# EAGLE board singleNode (EAGLE 9.0.1)
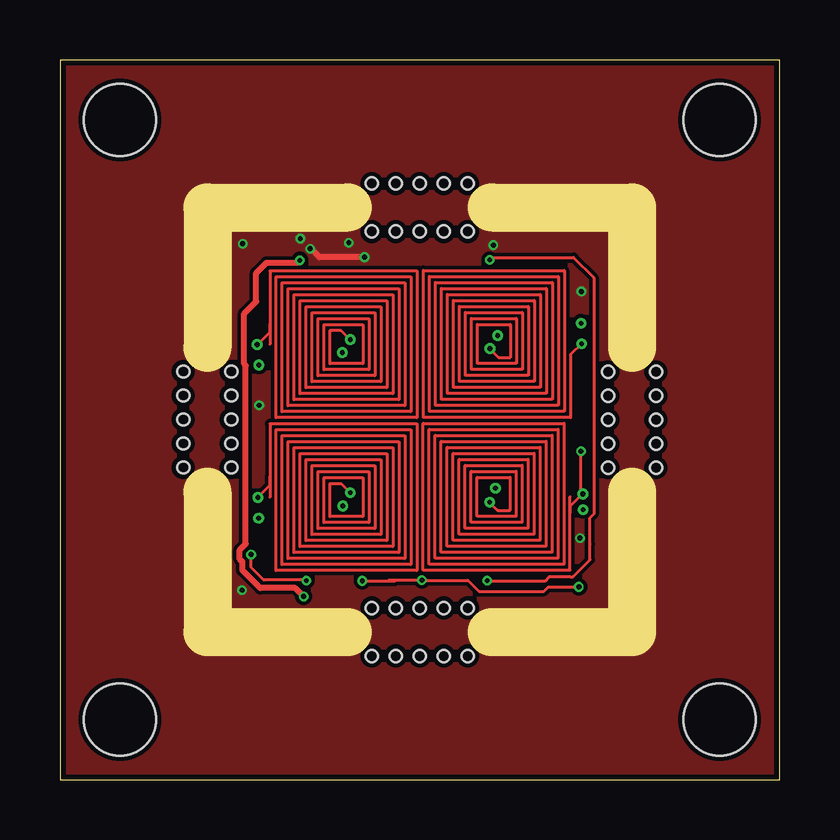
[diagram p0: board, top side]
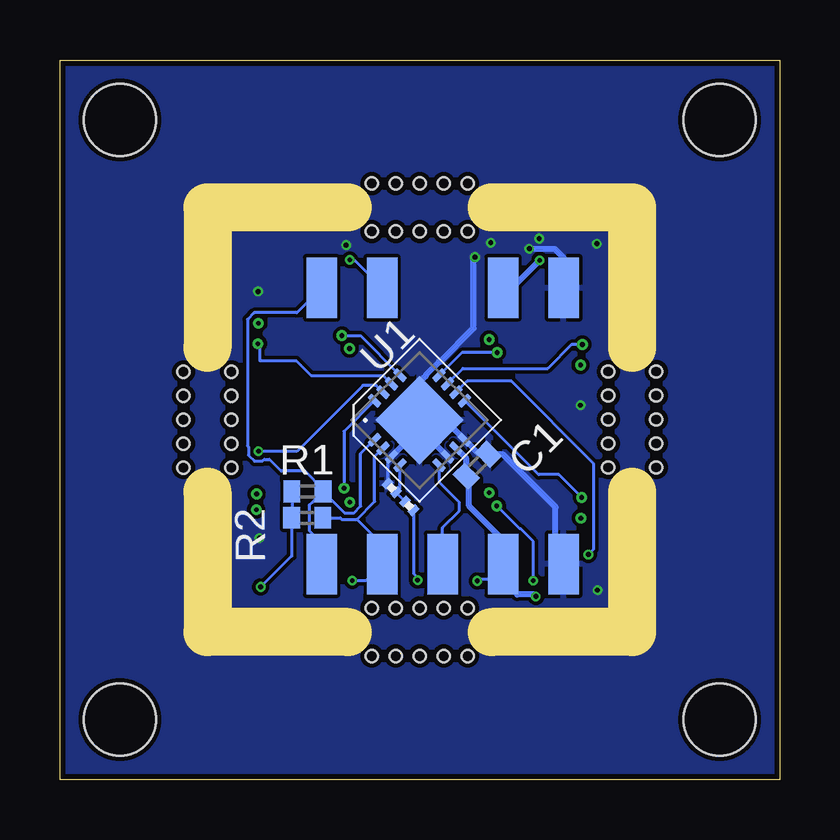
[diagram p1: board, bottom side, seen from below]

Size 30 x 30 mm. Coordinates in mm from the lower left corner, seen from the top.
Outline: 0,0 30,0 30,30 0,30 0,0
Copper layers (1+2*15+16): Top 0.035mm / dielectric 0.22mm / Route2 0.035mm / dielectric 0.99mm / Route15 0.035mm / dielectric 0.22mm / Bottom 0.035mm
Design rules "pcbtrain4l_narrowannulus": minimum track width 0.15mm, minimum drill 0.2mm, track to track 0.15mm, track to pad 0.15mm, pad to pad 0.15mm, via to via 0.15mm, smd to smd 0mil, copper to edge 9mil, drill to drill 0.2mm, minimum pad ring 0.125mm, minimum via ring 0.1mm, stop-mask expansion 0.125mm, vias tented up to drill 0.6mm, thermal gap 6mil
Holes 3 mm at 2.5,2.5 27.5,2.5 2.5,27.5 27.5,27.5
Holes 0.5 mm at 13,22.85 14,22.85 15,22.85 16,22.85 17,22.85 13,24.85 14,24.85 15,24.85 16,24.85 17,24.85 7.14,13.01 7.14,14.01 7.14,15.01 7.14,16.01 7.14,17.01 5.14,13.01 5.14,14.01 5.14,15.01 5.14,16.01 5.14,17.01 24.85,13 24.85,14 24.85,15 24.85,16 24.85,17 22.85,13 22.85,14 22.85,15 22.85,16 22.85,17 13,5.15 14,5.15 15,5.15 16,5.15 17,5.15 13,7.15 14,7.15 15,7.15 16,7.15 17,7.15
Milling: 8 lines

## Footprints (pad centres in the part's own frame; a part is rotated, then mirrored left to right if it is on the bottom)
C0402 = smd 0.7 x 0.9: 1 -0.65,0; 2 0.65,0
SMD1,27-2,54 = smd 1.27 x 2.54: 1 0,0
R0402 = smd 0.7 x 0.9: 1 -0.65,0; 2 0.65,0
R0201 = smd 0.28 x 0.43: 1 -0.255,0; 2 0.255,0
WQFN-16 = smd 0.6 x 0.25: ADDR -1.9,-0.75; CLIKIN -1.9,-0.25; IN0A 1.9,-0.75; IN0B 1.9,-0.25; IN1A 1.9,0.25; IN1B 1.9,0.75; SCL -1.9,0.75; SDA -1.9,0.25 | smd 2.6 x 2.6: DAP 0,0 | smd 0.25 x 0.6: GND 0.75,-1.9; IN2A 0.75,1.9; IN2B 0.25,1.9; IN3A -0.25,1.9; IN3B -0.75,1.9; INTB -0.75,-1.9; SD -0.25,-1.9; VDD 0.25,-1.9
FAT_SQUARE = drill 0.2 pad 0.3: EXITCOIL0 -3.239,2.822; EXITCOIL1 -3.219,-3.568; EXITCOIL2 3.239,3.528; EXITCOIL3 3.149,-2.832; INCOIL0 -6.79,3.15; INCOIL1 -6.76,-3.22; INCOIL2 6.74,3.19; INCOIL3 6.79,-3.07; INT1_INT2_COIL0 -6.716,2.299; INT1_INT2_COIL1 -6.726,-4.081; INT1_INT2_COIL2 6.716,4.041; INT1_INT2_COIL3 6.806,-3.729; TOP_INT1_COIL0 -2.905,3.36; TOP_INT1_COIL1 -2.905,-3.02; TOP_INT1_COIL2 2.915,2.99; TOP_INT1_COIL3 2.905,-3.42

## Placement (x,y rotation side)
C1  10uF  [C0402]  12.6,13.1 45 bottom
PAD1  WIREPADSMD1,27-254  [SMD1,27-2,54]  11.53,20.5 0 bottom
PAD2  WIREPADSMD1,27-254  [SMD1,27-2,54]  11.53,8.98 180 bottom
PAD3  WIREPADSMD1,27-254  [SMD1,27-2,54]  9.01,8.98 180 bottom
PAD4  WIREPADSMD1,27-254  [SMD1,27-2,54]  9.01,20.5 0 bottom
PAD5  WIREPADSMD1,27-254  [SMD1,27-2,54]  14.05,8.98 0 bottom
PAD6  WIREPADSMD1,27-254  [SMD1,27-2,54]  16.57,8.98 0 bottom
PAD7  WIREPADSMD1,27-254  [SMD1,27-2,54]  19.09,8.98 0 bottom
PAD9  WIREPADSMD1,27-254  [SMD1,27-2,54]  16.57,20.5 0 bottom
PAD10  WIREPADSMD1,27-254  [SMD1,27-2,54]  19.09,20.5 0 bottom
R1  10k  [R0402]  19.68,12.01 180 bottom
R2  10k  [R0402]  19.69,10.91 180 bottom
R3  NOFIT  [R0201]  15.44,11.41 315 bottom
R4  NOFIT  [R0201]  16.17,12.16 315 bottom
U1  LDC1614  [WQFN-16]  15.01,14.98 45 bottom
U$2  FATSQUARE_GROUP  [FAT_SQUARE]  15.01,14.98 0 top

## Library data of the parts
C1 R1-R4 = resistor
PAD1-PAD7 PAD9 PAD10 = wirepad
U1 = LDC1614
U$2 = coils

## Nets
ADDR: R3.1 R4.2 U1.ADDR
GND: C1.2 PAD3.1 PAD4.1 R4.1 U1.CLIKIN U1.DAP U1.GND U1.SD
INTRPT: PAD5.1 U1.INTB
N$6: U1.IN1A U$2.INCOIL0
N$7: U1.IN1B U$2.EXITCOIL0
N$8: U1.IN0A U$2.INCOIL1
N$9: U1.IN0B U$2.EXITCOIL1
N$10: U1.IN2A U$2.EXITCOIL2
N$11: U1.IN2B U$2.INCOIL2
N$12: U1.IN3A U$2.INCOIL3
N$13: U1.IN3B U$2.EXITCOIL3
SCL: PAD7.1 PAD10.1 R1.1 U1.SCL
SDA: PAD6.1 PAD9.1 R2.1 U1.SDA
VDD: C1.1 PAD1.1 PAD2.1 R1.2 R2.2 R3.2 U1.VDD

## Tracks (layer width: path | path; a pad name or v marks a point on that pad's centre or on a via)
ADDR
  Bottom 0.125: R3.1 15.99,11.96 | 15.99,11.96 R4.2 | U1.ADDR 15.82,12.13 15.99,11.96
GND  (via drill 0.2, 0.2 pad 0.1)
  Top 0.25: v10.43,22.13 10.47,22.13 10.82,21.78 v12.7,21.78
  Bottom 0.125: PAD3.1 9.01,8.59 | U1.CLIKIN 16.35,13.29 R4.1 | U1.CLIKIN
  Bottom 0.25: 15.01,14.63 U1.DAP | 15.01,13.39 15.01,14.32 | 15.01,14.32 U1.DAP | U1.DAP 13.95,14.98 U1.GND | U1.CLIKIN 15.01,14.63 | 15.01,14.63 U1.DAP | PAD3.1 9.01,9.74 | 12.76,18.82 12.78,18.84 | PAD3.1 | 12.53,13.56 11.54,13.56 9.34,11.36 9.34,9.31 PAD3.1 | U1.SD 14.7,14.32 15.01,14.32 | C1.2 12.53,13.56 | 12.53,13.56 U1.GND | U1.GND | v10.42,22.12 v10.43,22.13 9.38,22.13 9.01,21.76 PAD4.1 | 12.76,18.82 12.76,21.72 v12.7,21.78 | U1.DAP 15.01,16.57 14.76,16.82 14.76,16.86 14.2,17.42 14.16,17.42 12.76,18.82
  other vias: 10.02,22.55 7.62,22.34 7.59,7.9 12.04,22.38 18.07,22.28 21.74,20.35 21.68,10.07 8.3,15.6
  pour Bottom: -0.17,30.41 30.58,30.09 30.3,-0.34 -0.51,-0.28
  pour Top: -0.42,-0.28 -0.25,30.3 30.46,30.34 30.31,-0.34
INTRPT
  Bottom 0.125: PAD5.1 14.05,10.5 13.35,11.2 13.35,11.56 14.2,12.41 U1.INTB
N$6
  Bottom 0.125: U1.IN1A 13.2,17.14 9.66,17.14 8.67,18.13 U$2.INCOIL0
N$7
  Bottom 0.125: U$2.EXITCOIL0 13.25,17.8 U1.IN1B
N$8
  Bottom 0.125: U1.IN0A 10.05,12.71 9.2,12.71 U$2.INCOIL1
N$9  (via drill 0.2 pad 0.1)
  Top 0.125: v10.27,8.29 10.24,8.32 8.49,8.32 7.97,8.84 v7.97,9.38
  Bottom 0.125: U1.IN0B 13.03,16.61 | 13.03,16.61 | 13.03,16.61 11.19,16.61 7.74,13.16 7.74,9.61 v7.97,9.38 | U$2.EXITCOIL1 10.84,10.46 10.81,10.46 10.27,9.93 v10.27,8.29
N$10
  Bottom 0.125: U1.IN2A | U1.IN2A 17.48,18.51 U$2.EXITCOIL2
N$11
  Top 0.125: U$2.INCOIL2 21.66,18.08
  Bottom 0.125: U$2.INCOIL2 21.66,18.08 21.66,17.45 20.14,17.45 19.52,16.83 16.51,16.83 U1.IN2B
N$12  (via drill 0.2 pad 0.1)
  Top 0.125: 21.78,13.63 v21.72,13.69 21.72,11.99 U$2.INCOIL3
  Bottom 0.125: U1.IN3A 16.81,16.43 17.37,16.43 20.12,13.69 v21.72,13.69 | U1.IN3A
N$13
  Bottom 0.125: U1.IN3B 18.16,14.52 U$2.EXITCOIL3
SCL
  Bottom 0.125: U1.SCL 16.88,14.09 | 19.2,20.5 PAD10.1 20.12,19.47 21.9,19.47 22.19,19.18 22.19,13.91 22.14,13.86 22.14,13.52 21.89,13.27 21.55,13.27 21.48,13.35 21.27,13.35 20.78,12.86 19.79,12.86 | U1.SCL 16.88,14.09 | 16.88,14.09 | 19.79,12.86 | PAD7.1 19.09,9.86 19.6,10.37 19.6,11.45 19.48,11.57 19.47,11.57 R1.1 | R1.1 19.03,12.1 19.79,12.86 | R1.1 18.14,11.12 17.73,11.12 17.46,11.4 17.46,13.59 U1.SCL
SDA  (via drill 0.2 pad 0.1, 0.2 pad 0.3)
  Top 0.125: v17.92,21.67 18.02,21.77 21.41,21.77 22.25,20.93 22.25,11.07 22.09,10.91 22.09,9.81 22.09,9.17 21.38,8.45 21.28,8.45 20.39,8.45 20.23,8.29 v17.81,8.29
  Bottom 0.125: 17.26,21.19 PAD9.1 17.68,21.61 17.86,21.61 v17.92,21.67 | U1.SDA 16.88,13.46 16.88,11.59 17.62,10.85 | v17.81,8.29 17.26,8.29 PAD6.1 | 16.57,9.85 PAD6.1 | 16.98,8.98 PAD6.1 | 19.02,10.89 R2.1 18.32,10.91 18.26,10.85 17.62,10.85 | PAD6.1 16.57,9.84 | PAD6.1 16.57,9.8 17.62,10.85
VDD  (via drill 0.2 pad 0.1, 0.2 pad 0.3)
  Top 0.125: 13.98,8.31 v15.09,8.31 17,8.31 17.46,7.85 20.18,7.85 20.36,8.03 v21.63,8.03 | 13.98,8.31 13.71,8.31 | v12.6,8.28 13.95,8.28 13.98,8.31
  Top 0.25: 9.94,21.59 v10,21.65 9.9,21.55 8.61,21.55 8.18,21.12 8.18,19.93 7.68,19.43 7.68,17.32 7.74,17.26 7.74,9.82 7.5,9.58 7.5,9.18 7.61,9.07 7.61,8.73 8.35,7.98 9.81,7.98 v10.16,7.63
  Bottom 0.125: R3.2 15.26,8.59 15.11,8.44 15.11,8.33 v15.09,8.31 | PAD2.1 11.69,8.82 12.15,8.36 12.52,8.36 v12.6,8.28 | v21.63,8.03 20.34,9.32 R2.2 R1.2 | C1.1
  Bottom 0.25: PAD2.1 11.53,10 12.94,11.41 12.94,12.52 C1.1 13.06,13.38 U1.VDD | PAD1.1 11.53,21.42 11.36,21.59 | 11.53,20.15 PAD1.1 | 11.26,20.77 PAD1.1 | U1.VDD | 11.69,8.82 11.43,8.57 11.43,8.21 10.93,7.71 10.24,7.71 v10.16,7.63 | PAD1.1 11.15,20.5 v10,21.65